# Allegro board sant1ch.brd
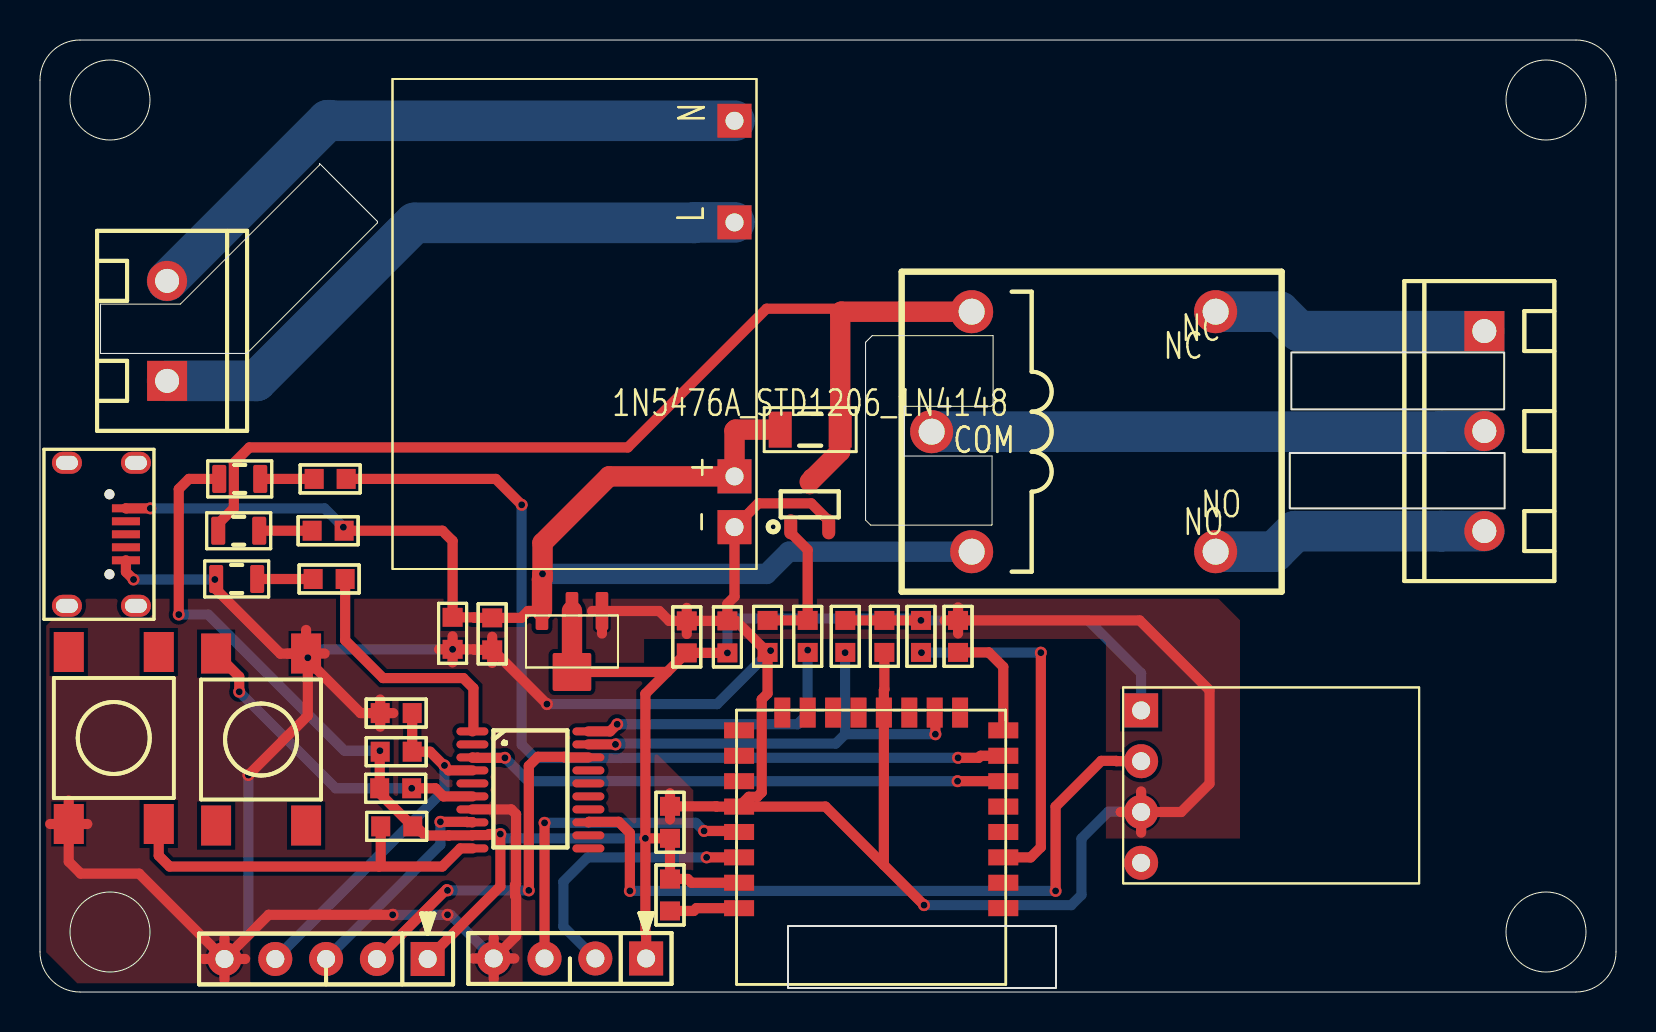
[diagram p0: board, top side]
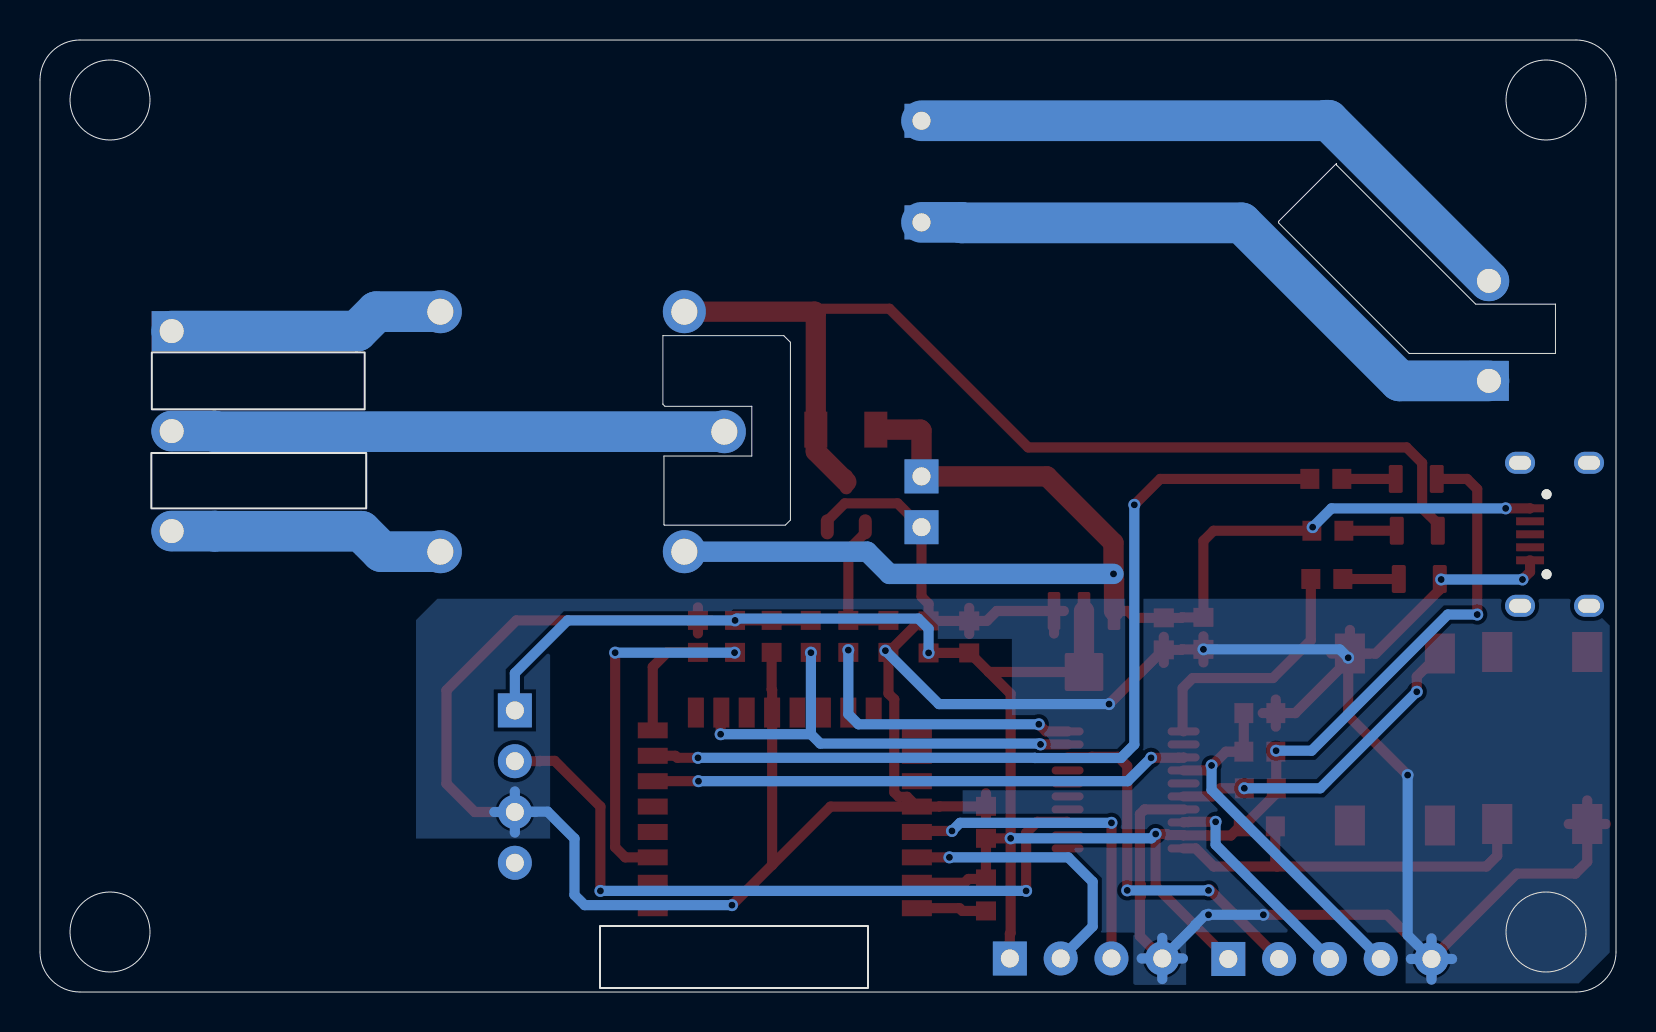
[diagram p1: board, bottom side, seen from below]

Outline 78.8 x 47.6 mm; copper layers: TOP, BOTTOM. Coordinates in mm from the lower left corner of the outline.
Outline path: circle c3.5,44.6 r2 ; circle c3.5,3 r2 ; rectangle 37.4,0.2 50.8,3.3 ; rectangle 62.49,24.18 73.23,26.95 ; rectangle 62.56,29.13 73.21,31.98 ; circle c75.3,44.6 r2 ; circle c75.3,3 r2 ; 0,45.6 0,2 arc(0.59,0.59) 2,0 76.8,0 arc(78.21,0.59) 78.8,2 78.8,45.6 arc(78.21,47.01) 76.8,47.6 2,47.6 arc(0.59,47.01) 0,45.6 ; 3.03,34.39 7.02,34.39 13.97,41.35 13.97,41.43 16.87,38.53 16.87,38.46 10.34,31.93 3.03,31.93 3.03,34.39 ; 41.28,32.49 41.28,23.6 41.53,23.34 47.58,23.34 47.6,23.37 47.6,26.8 43.21,26.8 43.21,29.29 47.55,29.29 47.66,29.39 47.66,32.82 41.61,32.82 41.28,32.49

## Placement (name value [footprint] x y rotation side)
C1  10UF/25V/0603  [STD0603]  22.61 17.91 270 top
C2  100NF/50V/0603  [STD0603]  20.63 17.93 270 top
C3  10UF/25V/0603  [STD0603]  32.34 17.75 90 top
C4  10UF/25V/0603  [STD0603]  31.5 8.48 90 top
C5  100NF/50V/0603  [STD0603]  42.22 17.78 270 top
C6  100NF/50V/0603  [STD0603]  34.37 17.75 90 top
C7  10UF/250V/0603  [STD0603]  17.81 13.94 180 top
D1  LED  [STD0805]  9.99 25.65 180 top
D2  1N4148  [STD1206]  38.51 28.12 0 top
D3  LED  [STD0805]  9.94 23.06 0 top
D4  LED  [STD0805]  9.83 20.65 0 top
R1  10k/J/0603  [STD0603]  31.5 4.85 270 top
R2  10k/J/0603  [STD0603]  44.05 17.78 270 top
R3  1k/J/0603  [STD0603]  14.51 25.65 180 top
R4  10k/J/0603  [STD0603]  45.9 17.78 90 top
R5  1k/J/0603  [STD0603]  40.26 17.78 270 top
R6  1k/J/0603  [STD0603]  14.41 23.06 180 top
R7  1k/J/0603  [STD0603]  17.81 12.01 0 top
R8  1k/J/0603  [STD0603]  17.84 8.28 180 top
R9  1k/J/0603  [STD0603]  38.38 17.78 270 top
R10  1k/J/0603  [STD0603]  17.78 10.19 0 top
R11  10k/J/0603  [STD0603]  36.38 17.78 270 top
R12  1k/J/0603  [STD0603]  14.46 20.65 180 top
SW1  SW PUSHBUTTON  [TS-033]  3.69 12.7 90 top
SW2  SW PUSHBUTTON  [TS-033]  11.05 12.62 270 top
U1  MICRO  [MICROUSB_B_4DIP]  4.3 22.89 270 top
U2  4P  [ZCZ254-1X4]  30.31 1.68 180 top
U3  2P  [TERMINAL-2P-5MM]  6.35 30.56 90 top
U4  AC-DC5V  [AC_DC5V_RPD]  26.73 33.4 90 top
U5  PSFB04  [PSF]  48.29 0.38 90 top
U6  AMS1117  [SOT89_AM1117]  26.6 17.53 180 top
U7  N76E003  [TSOP65P640X120-20N]  24.82 9.83 0 top
U8  SL-5V-RELAY  [HK3FF]  43.08 20.02 0 top
U9  3P  [TERMINAL-3P-5MM]  72.22 33.05 270 top
U10  2n7002  [SOT95P280X120-3]  38.49 24.38 0 top
U11  5P-1  [ZCZ254-1X5]  19.38 1.65 180 top
U12  433MODULE  [433MODULE_SYN480]  62.06 9.83 0 top

## Library data of the parts
C1-C7 = CAP NP
D1 D3 D4 = LED: User Part Number: pn; Tolerance: RichardLC
D2 = 1N5476A
R1-R12 = R
SW1 SW2 = SW PUSHBUTTON
U1 = MICRO-USB
U2 = 4P-1: User Part Number: pn; Tolerance: RichardLC
U3 = 2P
U4 = AC-DC5V
U5 = PSFB04
U6 = AMS1117
U7 = N76E003
U8 = SL-5V-RELAY
U9 = 3P
U10 = 2n7002: User Part Number: pn; Tolerance: RichardLC
U11 = 5P-1: User Part Number: pn; Tolerance: RichardLC
U12 = 4P-1

## Footprints (pads in the part's own frame, mm; a bottom-side part is the same pattern mirrored in y, then rotated)
433MODULE_SYN480
  rect 1.7x1.7 hole 0.9: 1(-7,4.25)
  round 1.7 hole 0.9: 2(-7,1.71) 3(-7,-0.83) 4(-7,-3.37)
AC_DC5V_RPD
  rect 1.7x1.7 hole 0.9: 1(5.08,-8) 2(10.16,-8) 3(-7.62,-8) 4(-10.16,-8)
HK3FF
  round 2.15 hole 1.3: 1(1.5,8) 2(3.5,2) 3(15.7,2) 4(15.7,14) 5(3.5,14)
MICROUSB_B_4DIP
  oval 1.1x1.5 hole 0.7x1.1: (-3.575,0.5) (-3.575,-2.95) (3.575,0.5) (3.575,-2.95)
  round 0.5 hole 0.7 unplated: (-2,-0.825) (2,-0.825)
  rect 0.4x1.4 smd: 1(-1.3,0) 2(-0.65,0) 3(0,0) 4(0.65,0) 5(1.3,0)
PSF
  rect 0.8x1.5 smd: 1(3.81,0.127) 2(5.08,0.127) 3(6.35,0.127) 4(7.62,0.127) 5(8.89,0.127) 6(10.16,0.127) 7(11.43,0.127) 8(12.7,0.127) 17(12.7,13.335) 18(11.43,13.335) 19(10.16,13.335) 20(8.89,13.335) 21(7.62,13.335) 22(6.35,13.335) 23(5.08,13.335) 24(3.81,13.335)
  rect 1.5x0.8 smd: 9(13.589,2.286) 10(13.589,3.556) 11(13.589,4.826) 12(13.589,6.096) 13(13.589,7.366) 14(13.589,8.636) 15(13.589,9.906) 16(13.589,11.176)
SOT89_AM1117
  custom 0.63x1.9 smd: 1(-1.5,-1.525) 2(0,-1.525) 3(1.5,-1.525)
  custom 1.93x1.9 smd: 4(0,1.525)
SOT95P280X120-3
  oval 0.65x1.25 smd: 1(-0.95,-1.125) 2(0.95,-1.125) 3(0,1.125)
STD0603
  rect 0.95x1 smd: 1(-0.8,0) 2(0.8,0)
STD0805
  custom 0.7x1.4 smd: 1(-1.025,0) 2(1.025,0)
STD1206
  rect 1.15x1.8 smd: 1(-1.5,0) 2(1.5,0)
TERMINAL-2P-5MM
  rect 2x2 hole 1.2: 1(0,0)
  round 2 hole 1.2: 2(5,0)
TERMINAL-3P-5MM
  rect 2x2 hole 1.2: 1(0,0)
  round 2 hole 1.2: 2(5,0) 3(10,0)
TS-033
  rect 2x1.5 smd: (4.3,2.25) (4.3,-2.25) 1(-4.3,2.25) 2(-4.3,-2.25)
TSOP65P640X120-20N
  oval 1.6x0.4 smd: 1(-3.2,3.2) 2(-3.2,2.55) 3(-3.2,1.9) 4(-3.2,1.25) 5(-3.2,0.6) 6(-3.2,-0.05) 7(-3.2,-0.7) 8(-3.2,-1.35) 9(-3.2,-2) 10(-3.2,-2.65) 11(2.6,-2.65) 12(2.6,-2) 13(2.6,-1.35) 14(2.6,-0.7) 15(2.6,-0.05) 16(2.6,0.6) 17(2.6,1.25) 18(2.6,1.9) 19(2.6,2.55) 20(2.6,3.2)
ZCZ254-1X4
  rect 1.7x1.7 hole 0.9: 1(0,0)
  round 1.7 hole 0.9: 2(2.54,0) 3(5.08,0) 4(7.62,0)
ZCZ254-1X5
  rect 1.7x1.7 hole 0.9: 1(0,0)
  round 1.7 hole 0.9: 2(2.54,0) 3(5.08,0) 4(7.62,0) 5(10.16,0)

## Nets
GND: C1.2 C2.2 C3.2 C4.2 C5.2 C6.2 C7.2 D4.1(CATHODE) R4.2 R11.2 SW1.1 SW2.1 U1.5(GND) U2.4 U4.4(GND) U5.12(GND#12) U5.20(GND#20) U6.1(GND) U7.7(GND) U10.2(S) U11.5 U12.3
VCC3V3: C3.1 C4.1 C5.1 C6.1 D1.2(ANODE) R1.1 R2.1 R5.1 R7.1 R8.1 R10.1 U2.1 U5.23(VCC) U6.2(VOUT0) U6.4(VOUT1) U7.9(VDD) U11.1 U12.1
VCC5V: C1.1 C2.1 D2.1(C) R6.1 U1.1(VBUS) U4.3(5V) U6.3(VIN) U8.2(C+)
433DATA: U7.13(P1.2) U12.2
433LED: R12.1 U7.1(P0.5)
CLK: U7.18(ICPCK/P0.2) U11.2
COM1: U8.1(COM) U9.2
CON_KEY1: R8.2 SW1.2 U7.10(P1.5)
CON_KEY2: R10.2 SW2.2 U7.6(P1.7/INT1)
CON_RELAY: R9.2 U7.20(P0.4)
DAT: U7.8(P1.6/ICPDA/TXD-1) U11.3
KEY1: R5.2 U5.10(IO0) U7.19(P0.3)
L: U3.1(COM) U4.1(L)
N: U3.2(OPEN) U4.2(N)
NC1: U8.4(N_C) U9.1
NO1: U8.3(N_O) U9.3
RELAY1: U5.6(IO12) U7.3(P0.7/RXD)
RST: C7.1 R7.2 U7.4(P2.0/RST) U11.4
RX: U2.3 U5.21(RX)
SLED: R3.1 U5.7(IO13)
TX: U2.2 U5.22(TX)
N74692: D1.1(CATHODE) R3.2
N74876: R4.1 U5.8(IO15)
N74930: R2.2 U5.3(EN)
N74938: R1.2 U5.24(RESET)
N76491: D4.2(ANODE) R12.2
N77532: D2.2(A) D3.1(CATHODE) U8.5(C-) U10.3(D)
N77728: R9.1 R11.1 U10.1(G)
N81711: D3.2(ANODE) R6.2

Pads without a net: U1 2 3 4; U5 1 2 4 5 9 11 13 14 15 16 17 18 19; U7 2 5 11 12 14 15 16 17; U12 4

## Via types
v1: diameter 0.6, hole 0.35, TOP to BOTTOM, 41 vias

## Routing (per net, layer and track width the routed paths; a pad name or vN(x,y) marks a point on that pad's centre or on a via; arc(x,y) is an arc through that point)
GND: length 228.1
  TOP w0.508: SW1.1 2.37,8.4 ; SW1.1 1.44,6.52 2.04,5.92 4.96,5.92 U11.5 ; SW1.1 0.51,8.4 ; SW1.1 1.44,9.58 ; v1(20.63,17.13) 20.63,17.79 ; v1(20.63,17.13) 19.95,17.13 ; v1(20.63,17.13) 21.7,17.13 21.73,17.11 C1.2 ; v1(20.63,17.13) 20.63,16.48 ; R4.2 45.9,19.23 ; R4.2 45.9,17.93 ; R4.2 54.98,18.58 58.48,15.09 58.48,10.41 57.06,9 U12.3 ; R4.2 45.22,18.58 ; C7.2 17.66,13.94 ; C7.2 16.03,13.94 13.3,16.67 SW2.1 ; C7.2 17.01,13.27 ; C7.2 17.01,14.62 ; C3.2 C6.2 ; C3.2 31.46,18.55 30.96,19.05 U6.1 ; C3.2 32.34,19.21 ; C3.2 32.34,17.9 ; C6.2 34.8,18.55 R11.2 36.38,14.92 36.09,14.63 36.09,9.98 35.86,9.76 35.44,9.76 U5.20 ; C6.2 34.37,19.41 34.73,19.77 U4.4 35.92,24.43 38.56,24.43 39.44,23.56 U10.2 ; C5.2 42.22,15.13 42.19,15.1 U5.12 42.19,6.35 ; U12.3 55.06,7.97 ; U12.3 54.03,9 ; U12.3 55.06,10.03 ; 22.69,0.65 U2.4 ; U2.4 23.8,2.79 23.8,4.75 23.76,4.8 23.76,5.36 23.8,5.41 23.8,8.89 23.56,9.13 U7.7 ; U2.4 22.69,2.7 ; U2.4 21.66,1.68 ; U2.4 23.71,1.68 ; U11.5 9.22,2.68 ; U11.5 11.43,3.86 v1(17.63,3.86) ; U11.5 10.25,1.65 ; U11.5 8.2,1.65 ; U11.5 9.22,0.62 ; U5.20 33.82,9.27 33.81,9.28 C4.2 ; U5.20 39.27,9.27 42.19,6.35 ; 42.19,6.35 v1(44.2,4.34) ; C4.2 31.5,9.94 ; C4.2 31.5,8.63 ; v1(4.68,20.63) 4.3,21 U1.5 ; SW2.1 14.23,16.92 ; SW2.1 12.38,16.92 ; SW2.1 13.3,18.1 ; SW2.1 13.3,16.92 12.02,16.92 8.81,20.13 D4.1 ; U6.1 27.61,19.05 ; U6.1 28.1,17.92 ; 22.61,16.45 C1.2 ; C1.2 22.64,17.11 v1(25.35,14.4) ; C1.2 22.61,17.76 ; v1(10.42,10.85) 13.39,13.82 v1(13.39,16.71)
  BOTTOM w0.508: v1(10.42,10.85) 10.42,2.85 U11.5 ; U2.4 21.04,3.33 21.04,3.35 20.53,3.86 v1(20.38,3.86) v1(17.63,3.86) ; U2.4 23.71,1.68 ; U2.4 21.66,1.68 ; U2.4 22.69,0.65 ; U2.4 22.69,2.7 ; U12.3 55.06,10.03 ; U12.3 56.08,9 ; U12.3 55.06,7.97 ; U12.3 54.03,9 ; U12.3 55.04,9.02 53.42,9.02 52.07,7.67 52.07,4.85 51.57,4.34 v1(44.2,4.34) ; U11.5 9.22,2.68 ; U11.5 8.2,1.65 ; U11.5 9.22,0.62 ; U11.5 10.25,1.65 ; v1(36.53,17.07) 33.86,14.4 v1(25.35,14.4) ; v1(13.39,16.71) 13.81,17.13 v1(20.63,17.13) ; v1(4.68,20.63) v1(8.74,20.63)
VCC3V3: length 107.2
  TOP w0.508: 31.36,16 30.27,14.91 v1(30.27,7.68) ; 31.36,16 U6.4 ; 31.36,16 32.31,16.95 C3.1 v1(34.37,16.95) ; R5.1 C5.1 v1(44.05,18.58) ; v1(30.27,7.68) C4.1 R1.1 32.38,5.65 32.57,5.46 U5.23 ; v1(30.27,7.68) 30.27,2.95 30.31,2.91 U2.1 ; v1(6.94,18.87) 6.94,25.15 7.45,25.65 D1.2 ; R7.1 16.98,11.99 R10.1 16.98,9.93 R8.1 18.8,8.28 19.26,7.82 20.43,7.82 20.44,7.83 U7.9 21.64,7.84 22.41,7.84 22.46,7.9 v1(23.02,7.9) 23.02,5.28 U11.1
  TOP w1.016: U6.2 U6.4
  BOTTOM w0.508: U12.1 55.06,15.94 52.42,18.58 v1(44.05,18.58) 43.96,18.67 34.88,18.67 34.37,18.16 v1(34.37,16.95) ; v1(23.02,7.9) 23.23,7.68 v1(30.27,7.68) ; v1(6.94,18.87) 8.41,18.87 15.22,12.07 v1(17,12.07)
VCC5V: length 66.2
  TOP w0.508: v1(5.52,24.18) 4.3,24.18 U1.1 ; U6.3 24.4,19.05 24.06,18.71 C1.1 21.73,18.71 21.7,18.73 C2.1 20.63,22.56 20.12,23.06 R6.1
  TOP w1.016: U6.3 25.1,20.64 25.13,20.66 v1(25.13,20.9) 25.13,22.45 28.45,25.78 U4.3 34.73,28.07 34.78,28.12 D2.1
  BOTTOM w0.508: v1(15.17,23.24) 14.23,24.18 v1(5.52,24.18)
  BOTTOM w1.016: U8.2 37.44,22.02 36.33,20.9 v1(25.13,20.9)
433DATA: length 35.9
  TOP w0.508: U7.13 27.45,8.51 28.94,8.51 29.49,7.95 v1(29.49,5.05) ; U12.2 53.83,11.54 53.81,11.56 53.07,11.56 50.78,9.27 v1(50.78,5.05)
  BOTTOM w0.508: v1(50.78,5.05) v1(29.49,5.05)
433LED: length 12.6
  TOP w0.508: R12.1 15.26,17.59 17.15,15.7 21.16,15.7 21.67,15.19 21.67,13.08 U7.1
CLK: length 18.5
  TOP w0.508: v1(20.38,5.08) 20.32,5.13 U11.2 ; U7.18 26.24,11.73 26.21,11.76 24.9,11.76 24.44,11.3 v1(24.44,5.08)
  BOTTOM w0.508: v1(24.44,5.08) v1(20.38,5.08)
COM1: length 27.6
  BOTTOM w2.032: U8.1 70.04,28.02 70.07,28.05 U9.2
CON_KEY1: length 19.9
  TOP w0.508: SW1.2 5.94,6.82 6.48,6.27 16.95,6.27 ; 16.95,6.27 20.11,6.27 21.02,7.18 U7.10 ; 16.95,6.27 17.04,6.36 R8.2
CON_KEY2: length 16.2
  TOP w0.508: SW2.2 9.96,15.77 v1(9.96,15.01) ; U7.6 20.17,9.78 19.77,10.19 v1(18.58,10.19)
  BOTTOM w0.508: v1(18.58,10.19) 14.79,10.19 v1(9.96,15.01)
CON_RELAY: length 14.5
  TOP w0.508: v1(28.86,13.39) 28.5,13.03 U7.20
  BOTTOM w0.508: v1(28.86,13.39) 37.88,13.39 38.38,13.89 v1(38.38,17.09)
DAT: length 10.8
  TOP w0.508: v1(20.02,8.51) 21.34,8.51 21.36,8.5 21.61,8.5 U7.8
  BOTTOM w0.508: U11.3 20.02,7.37 v1(20.02,8.51)
KEY1: length 22.7
  TOP w0.508: v1(44.77,12.89) 44.77,13.93 U5.10 ; U7.19 v1(28.77,12.38)
  BOTTOM w0.508: 40.25,12.89 v1(44.77,12.89) ; 40.25,12.89 v1(40.25,16.97) ; 40.25,12.89 39.79,12.42 28.88,12.42 28.84,12.38 v1(28.77,12.38)
L: length 31.7
  BOTTOM w2.032: U3.1 10.83,30.56 18.72,38.46 32.71,38.46 32.73,38.48 U4.1
N: length 31.7
  BOTTOM w2.032: U4.2 14.53,43.56 14.51,43.59 14.38,43.59 U3.2
NC1: length 13.8
  BOTTOM w2.032: U9.1 62.95,33.05 61.98,34.02 U8.4
NO1: length 13.9
  BOTTOM w2.032: U9.3 70.07,23.05 70.07,23.04 62.74,23.04 61.72,22.02 U8.3
RELAY1: length 27
  TOP w0.508: U5.6 v1(45.88,10.54) ; v1(23.25,11.71) 21.89,11.71 21.88,11.72 21.64,11.72 U7.3
  BOTTOM w0.508: v1(23.25,11.71) 24.41,10.54 v1(45.88,10.54)
RST: length 18.5
  TOP w0.508: v1(20.22,11.33) 20.19,11.33 ; 20.19,11.33 20.44,11.08 U7.4 ; 20.19,11.33 19.51,12.01 R7.2 C7.1
  BOTTOM w0.508: U11.4 20.22,10.11 v1(20.22,11.33)
RX: length 16.7
  TOP w0.508: U2.3 v1(25.23,8.46) ; v1(33.2,8.05) 34.9,8.05 U5.21
  BOTTOM w0.508: v1(25.23,8.46) 32.8,8.46 v1(33.2,8.05)
SLED: length 45.7
  TOP w0.508: v1(45.9,11.71) 46.93,11.71 47.03,11.81 U5.7 ; R3.1 22.79,25.65 v1(24.08,24.36)
  BOTTOM w0.508: v1(45.9,11.71) 29.07,11.71 29.05,11.7 24.75,11.7 24.08,12.37 v1(24.08,24.36)
TX: length 13.8
  TOP w0.508: U5.22 v1(33.33,6.73)
  BOTTOM w0.508: v1(33.33,6.73) 27.39,6.73 26.17,5.51 26.17,3.28 U2.2
N74692: length 2.7
  TOP w0.508: D1.1 R3.2
N74876: length 5.7
  TOP w0.508: U5.8 48.16,16.26 47.44,16.98 R4.1
N74930: length 17.8
  TOP w0.508: v1(50.04,16.97) 50.04,7.24 49.53,6.73 U5.3
  BOTTOM w0.508: v1(50.04,16.97) v1(44.07,16.97)
N74938: length 3.5
  TOP w0.508: R1.2 32.68,4.05 32.82,4.19 U5.24
N76491: length 2.8
  TOP w0.508: D4.2 R12.2
N77532: length 53
  TOP w0.508: D3.1 8.91,23.41 9.69,24.2 9.69,26.45 10.47,27.23 29.39,27.23 36.33,34.16 39.92,34.16 40.07,34.02
  TOP w1.016: U8.5 40.07,34.02 40.01,33.96 D2.2 40.01,27.03 U10.3
N77728: length 7
  TOP w0.508: R11.1 R9.1 38.38,22.11 37.54,22.96 U10.1
N81711: length 2.6
  TOP w0.508: D3.2 R6.2

## Copper pours and planes (outline as drawn; the poured copper is in the pictures)
GND on TOP: 0.31,18.31 0.31,1.98 1.86,0.43 10.52,0.43 10.52,2.95 10.49,2.97 21.49,2.97 21.49,0.43 21.42,0.36 24.06,0.36 24.13,0.43 24.13,2.82 24.06,2.9 24.13,2.97 32.67,2.97 32.67,10.08 30.21,12.55 30.21,17.65 53.12,17.65 53.29,17.48 53.29,7.67 60,7.67 60,18.59 58.93,19.66 1.66,19.66 ; 6 cut-outs
GND on BOTTOM: 1.66,19.66 58.93,19.66 60,18.59 60,7.67 53.29,7.67 53.29,17.48 53.12,17.65 30.21,17.65 30.21,12.55 32.67,10.08 32.67,2.97 24.13,2.97 24.06,2.9 24.13,2.82 24.13,0.43 24.06,0.36 21.42,0.36 21.49,0.43 21.49,2.97 10.49,2.97 10.52,2.95 10.52,0.43 1.86,0.43 0.31,1.98 0.31,18.31 ; 5 cut-outs

## Text on the board
Ref Des/Assembly Top: - | +
DISPLAY_TOP: FIGURE | SIZE | 13.78 | 35.433 | 47.244 | 51.181 | 27.559 | 43.307x27.559 | DRILL CHART: TOP to BOTTOM | ALL UNITS ARE IN MILS | PLATED | NON-PLATED | QTY | 41 | 17 | 5 | 2 | 4
